# Altium PCB Eurocard VME 3U with break-away tab (3.937 x 8.660 inches).PCBDOC
Units mil, origin at the board's own origin, x right, y up, seen from the top; angles counter-clockwise.
Board outline 8660 x 4687 mil, 10 copper layers (TopLayer, MidLayer1, MidLayer2, MidLayer3, MidLayer4, MidLayer5, MidLayer6, MidLayer7, MidLayer8, BottomLayer); 1 components, 0 nets, 116 pads, 0 vias.
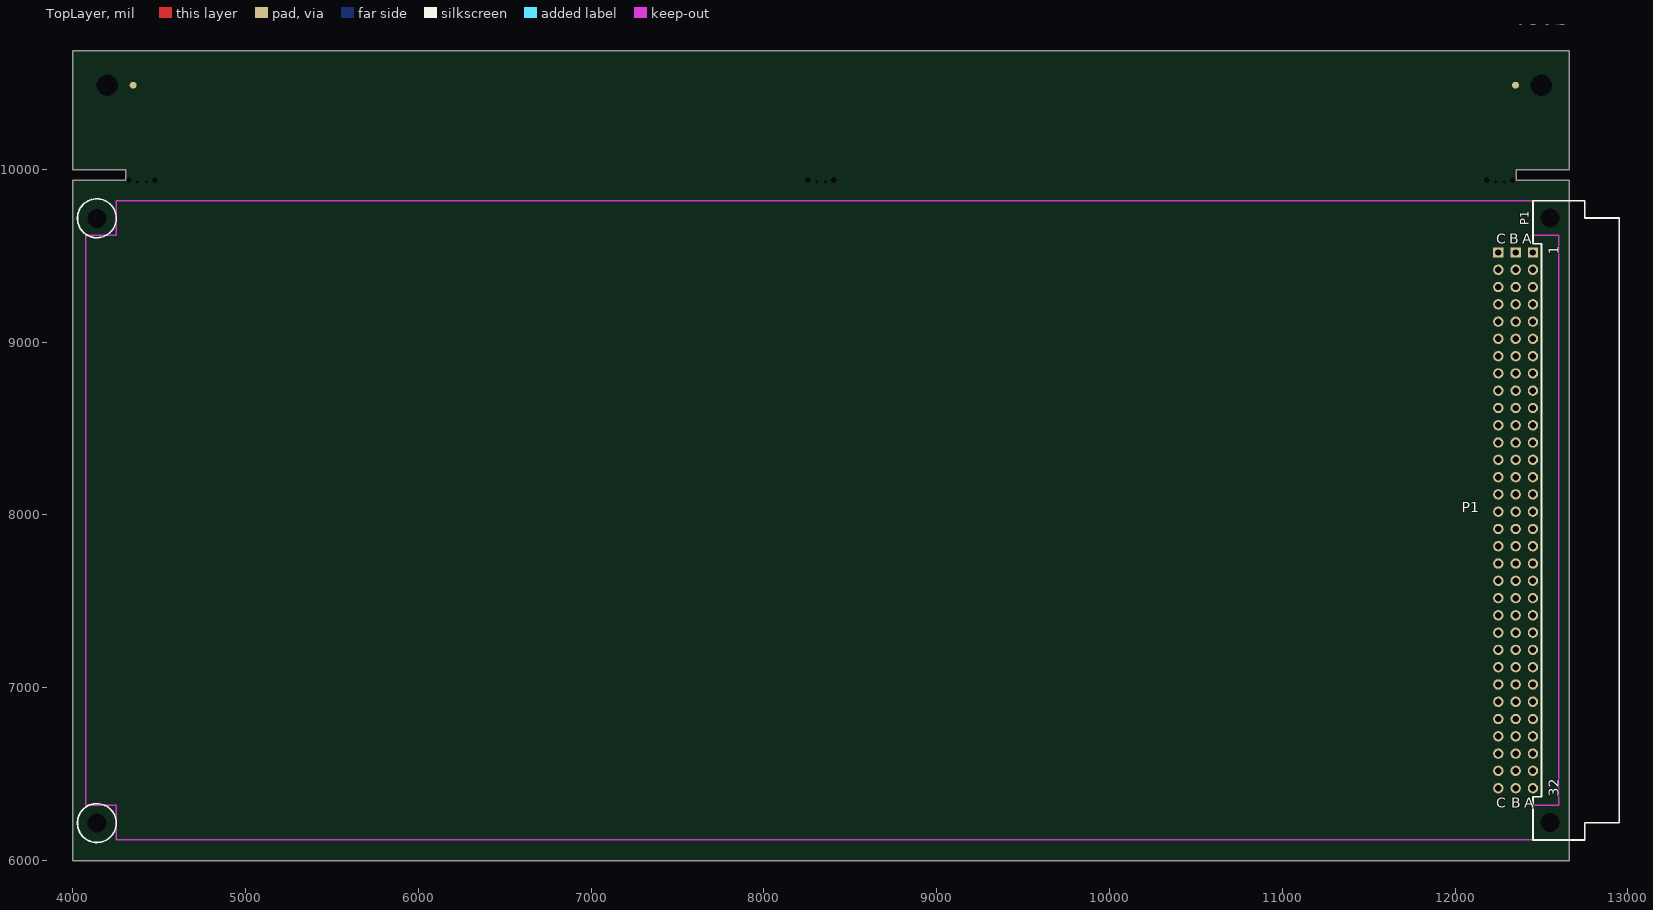
[diagram p0: TopLayer view]
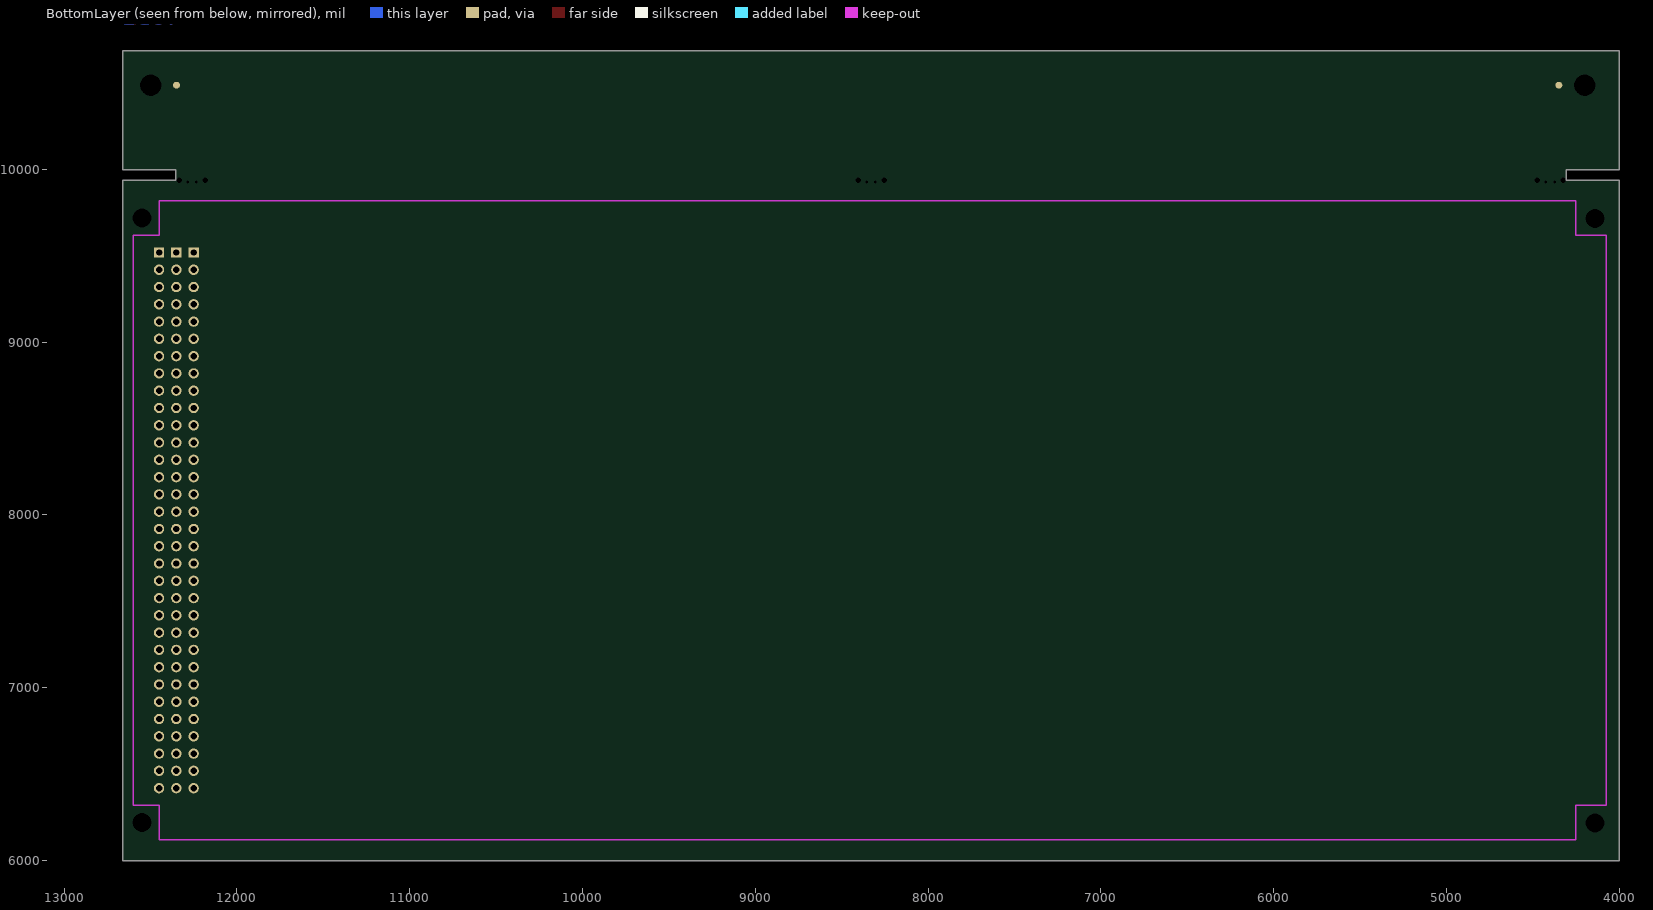
[diagram p1: BottomLayer view, seen from below]
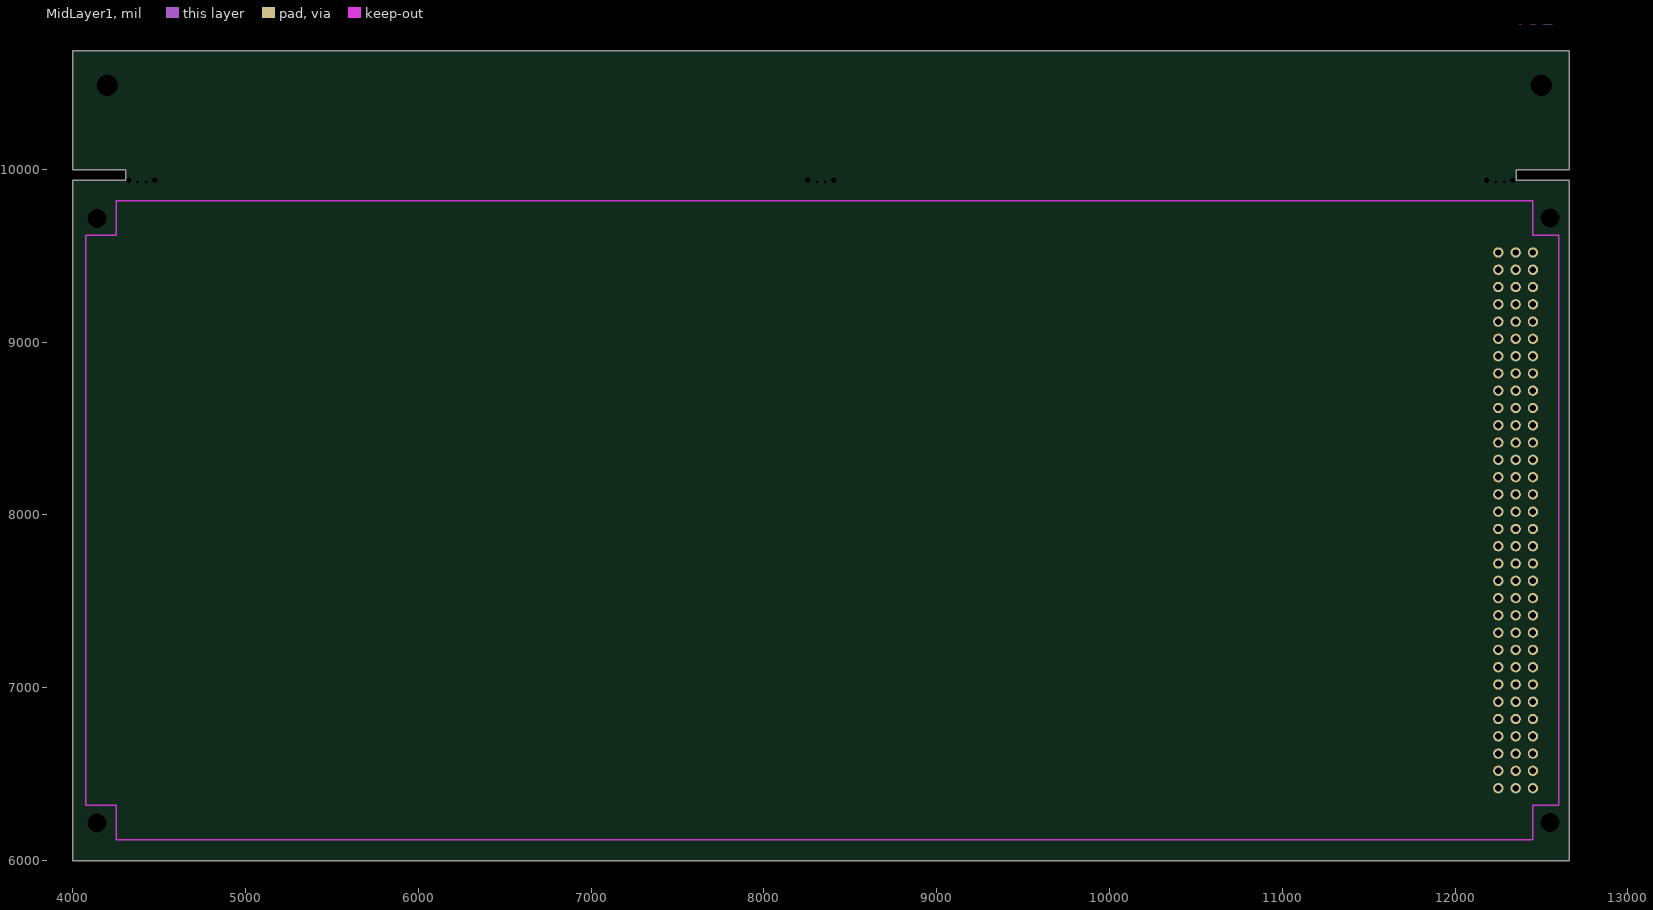
[diagram p2: MidLayer1]
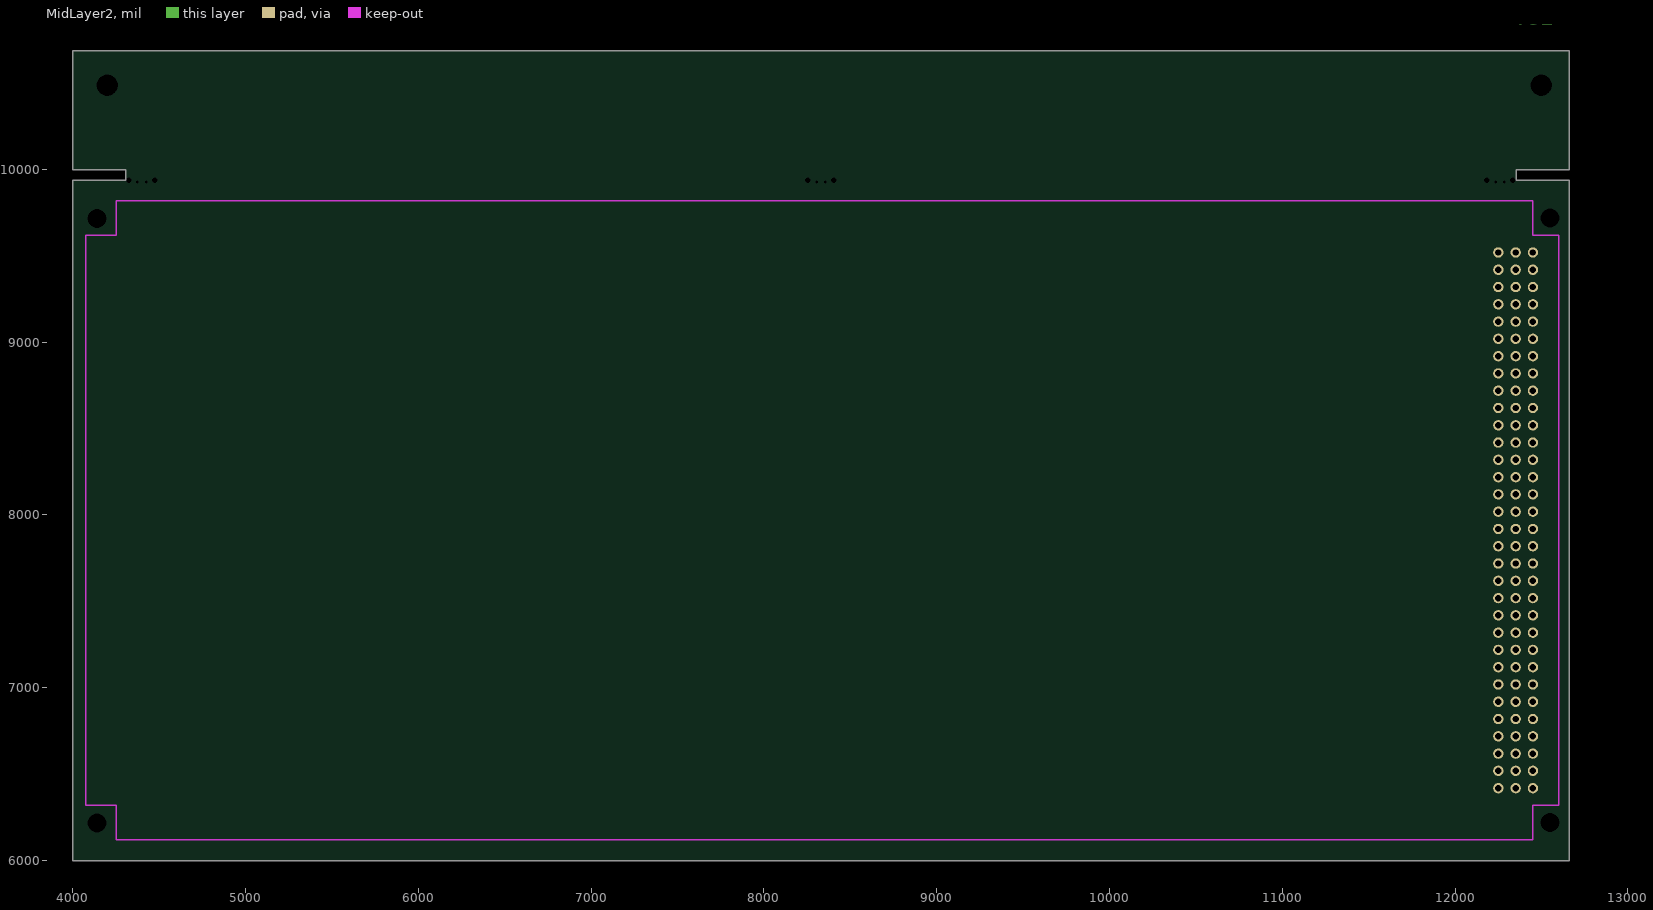
[diagram p3: MidLayer2]
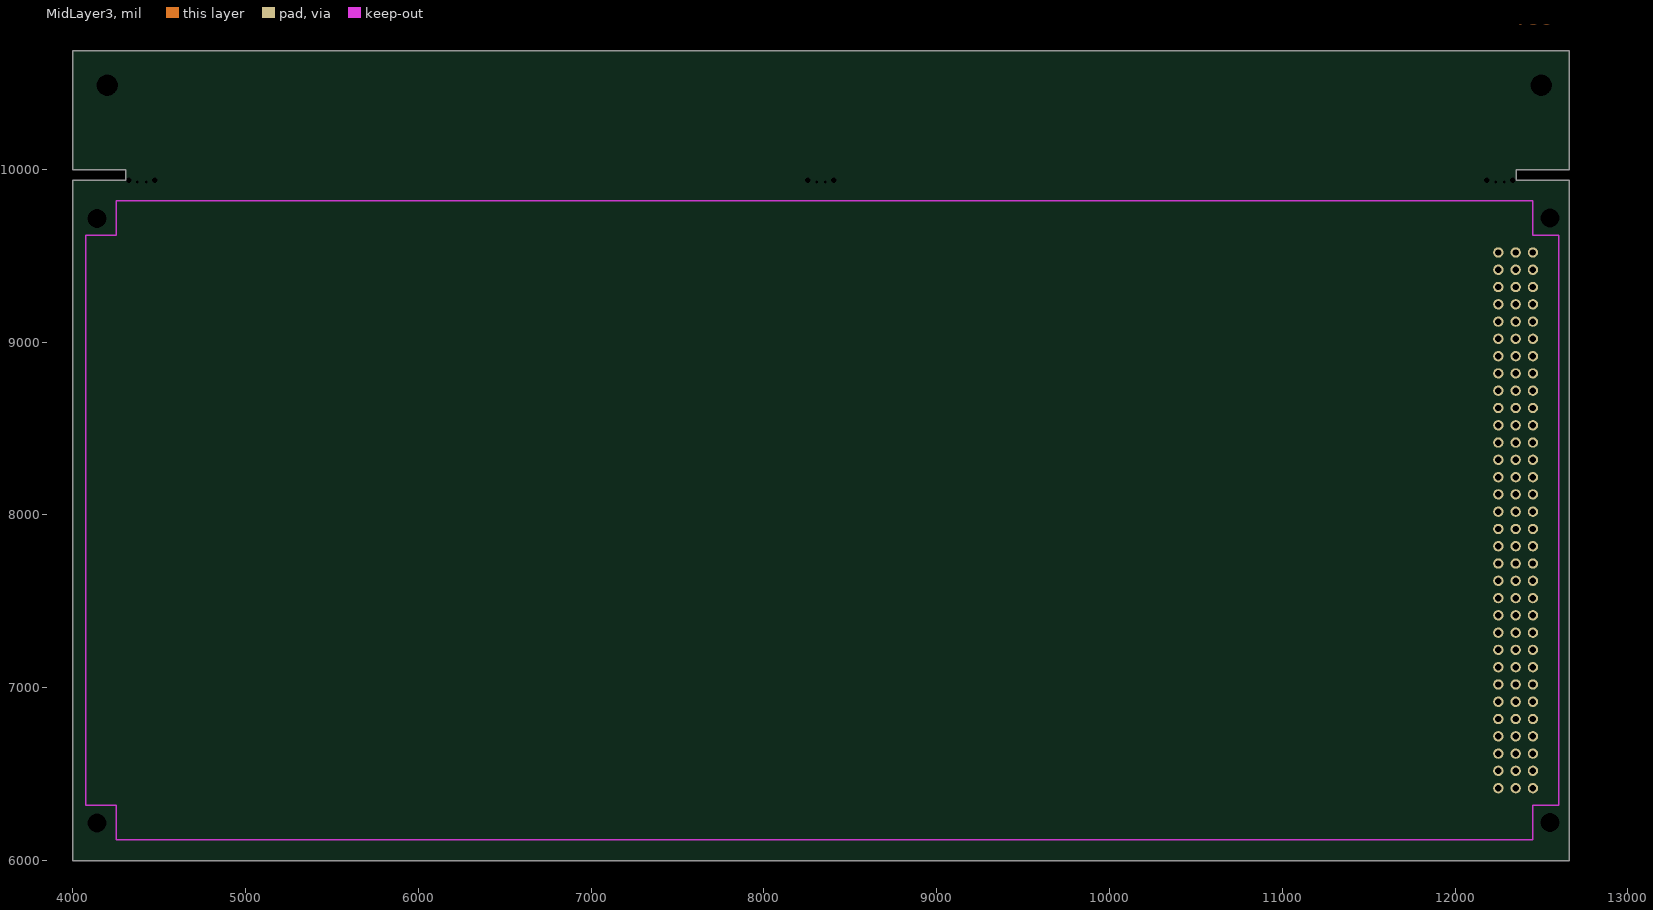
[diagram p4: MidLayer3]
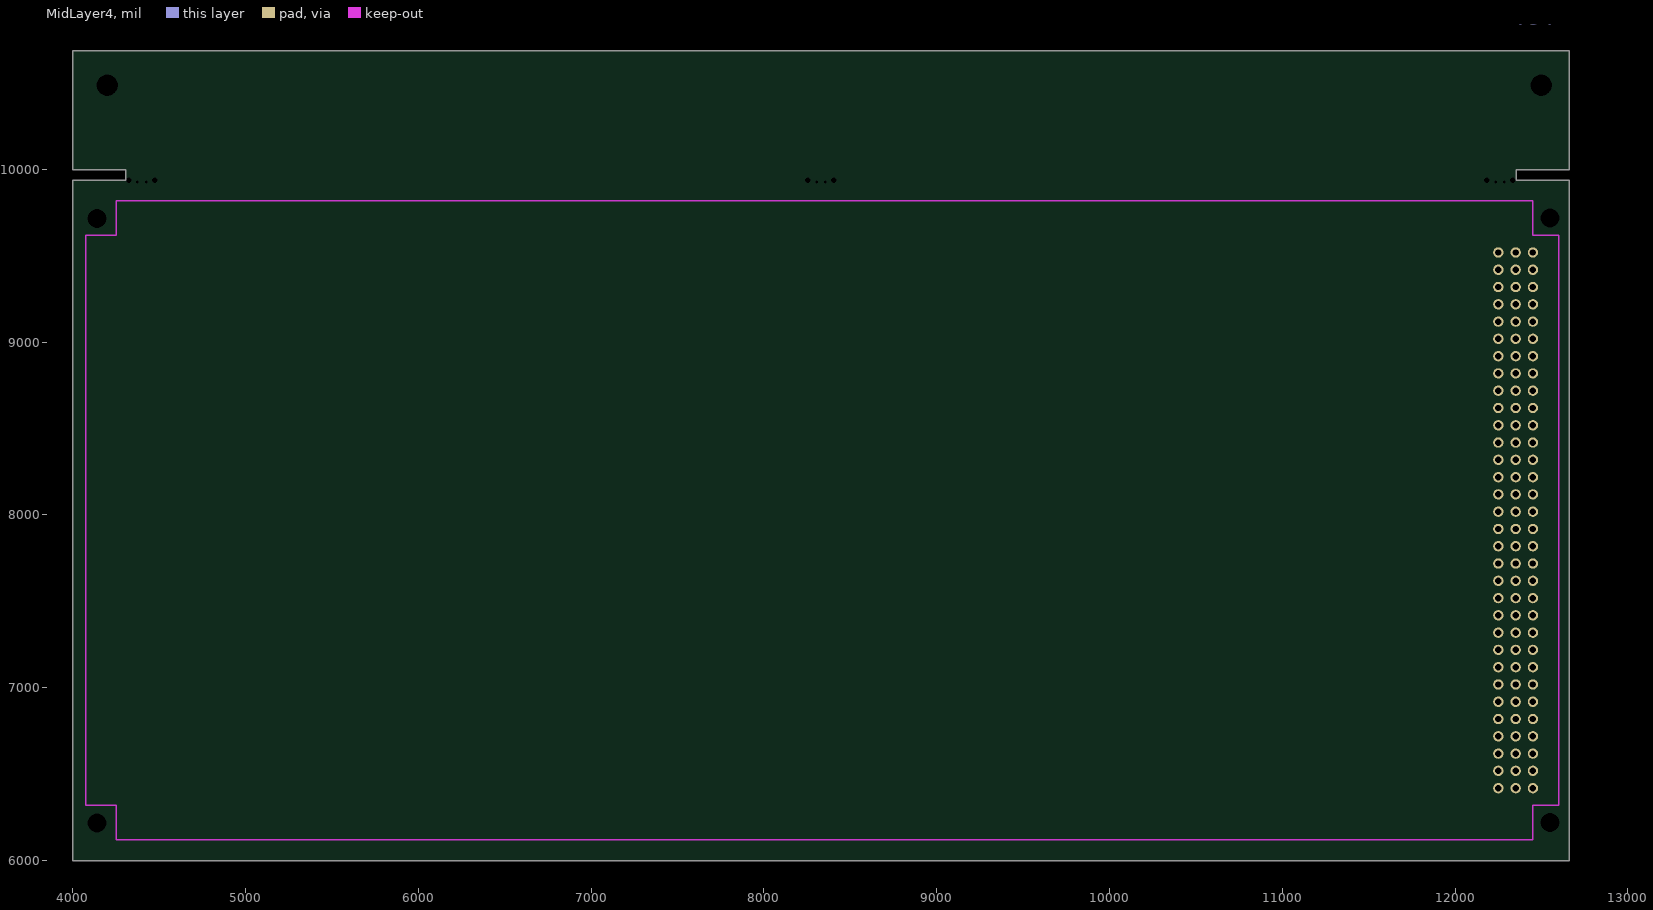
[diagram p5: MidLayer4]
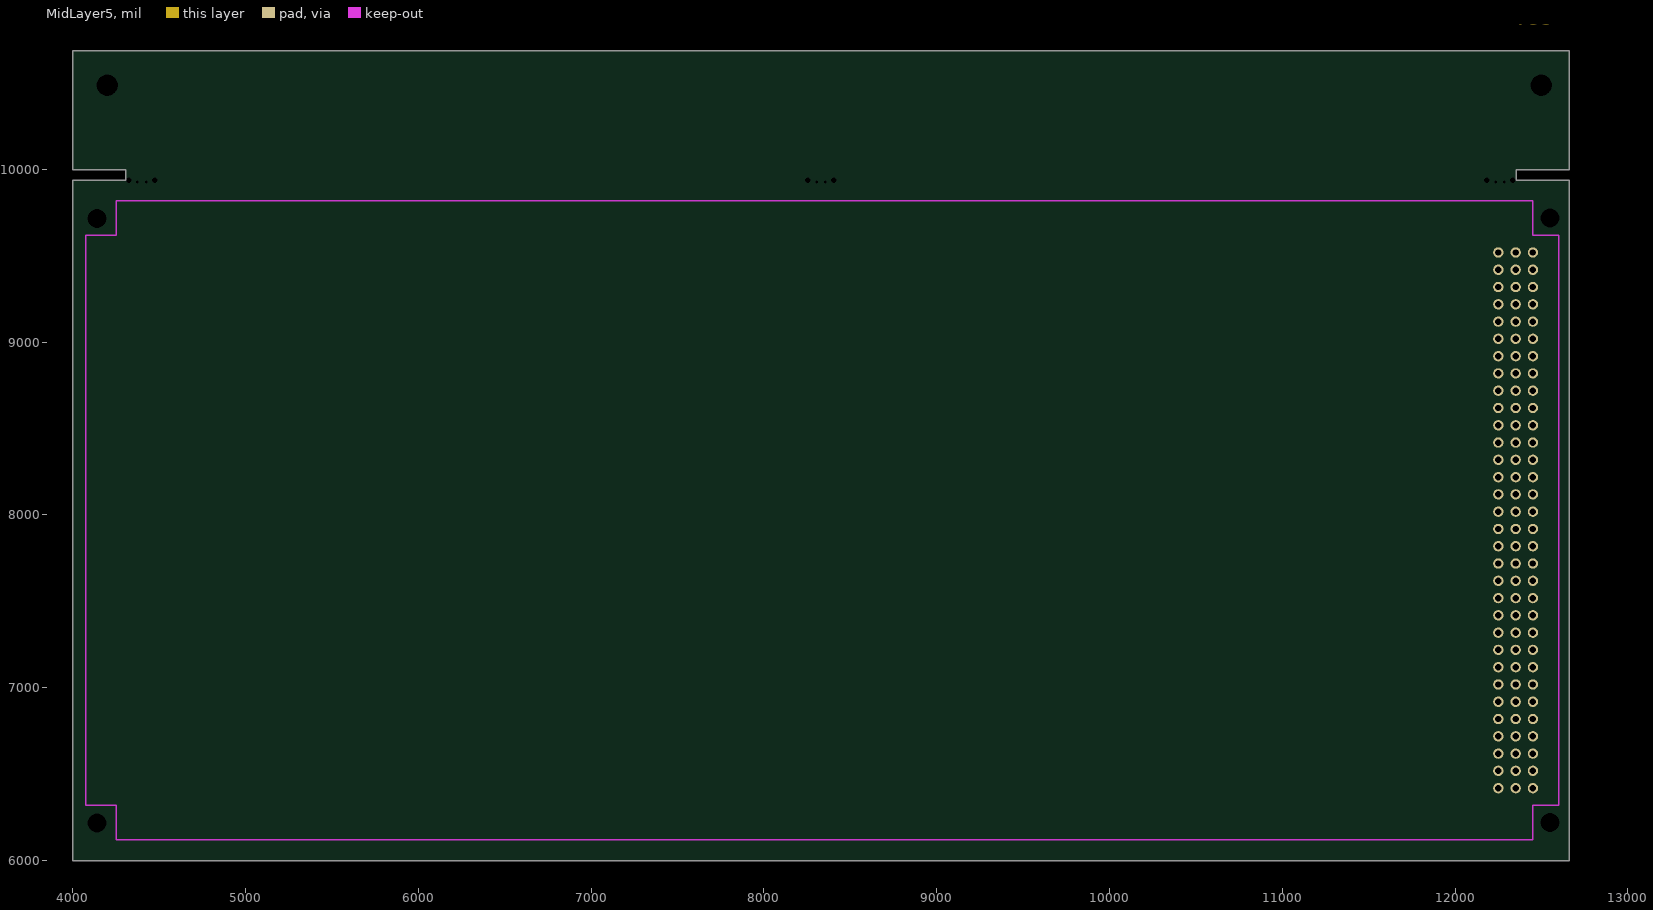
[diagram p6: MidLayer5]
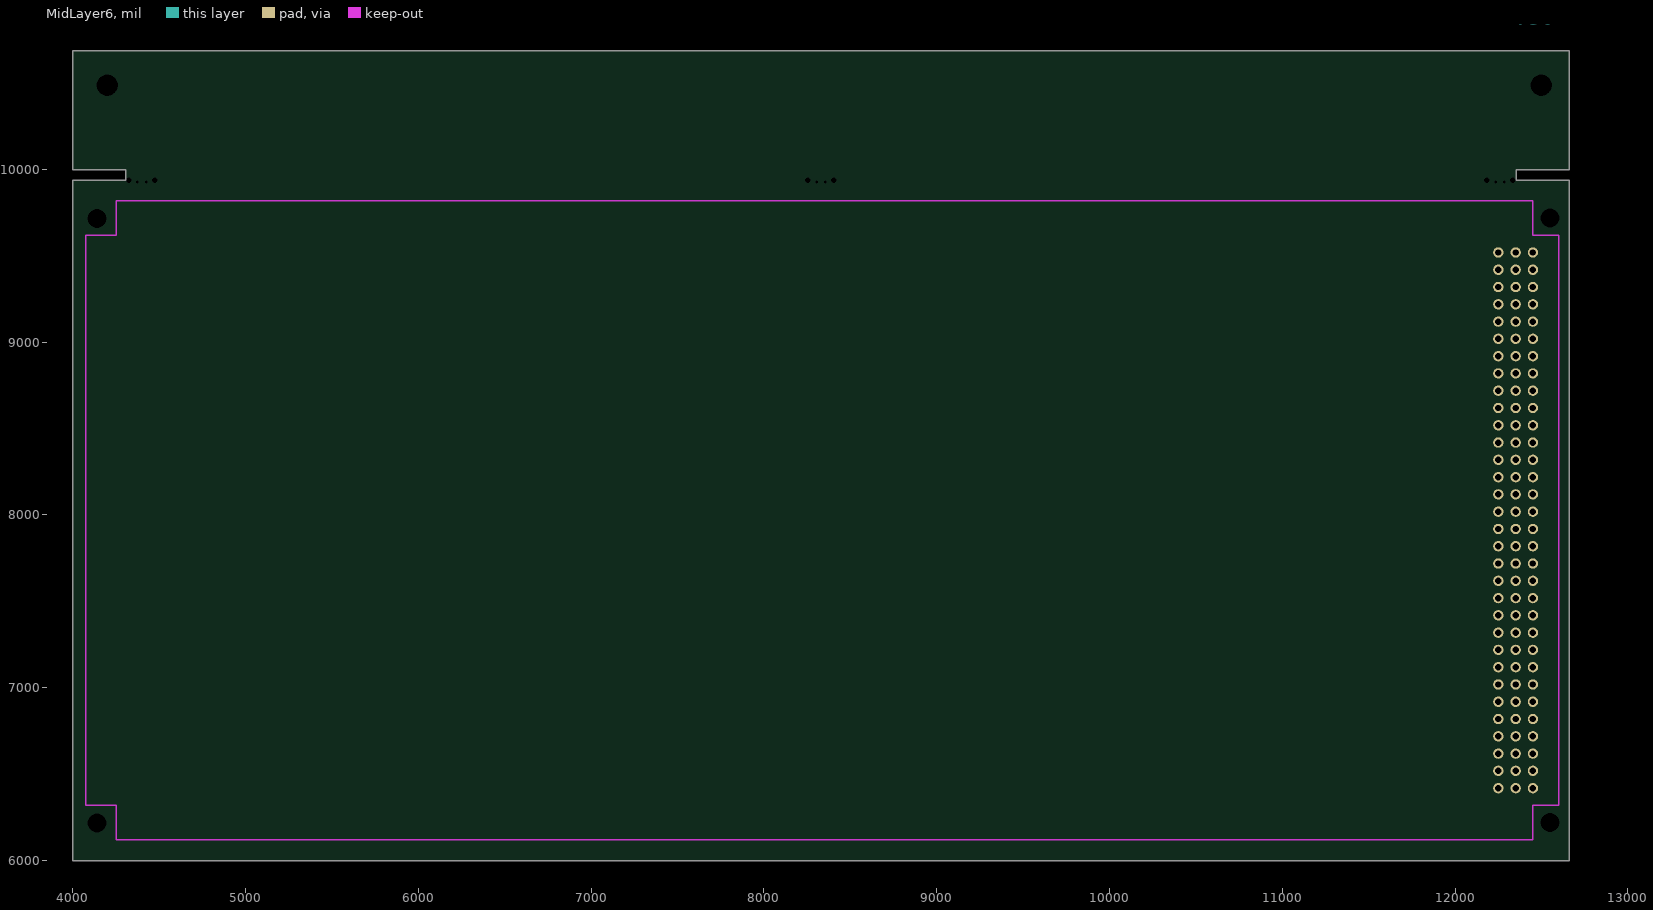
[diagram p7: MidLayer6]
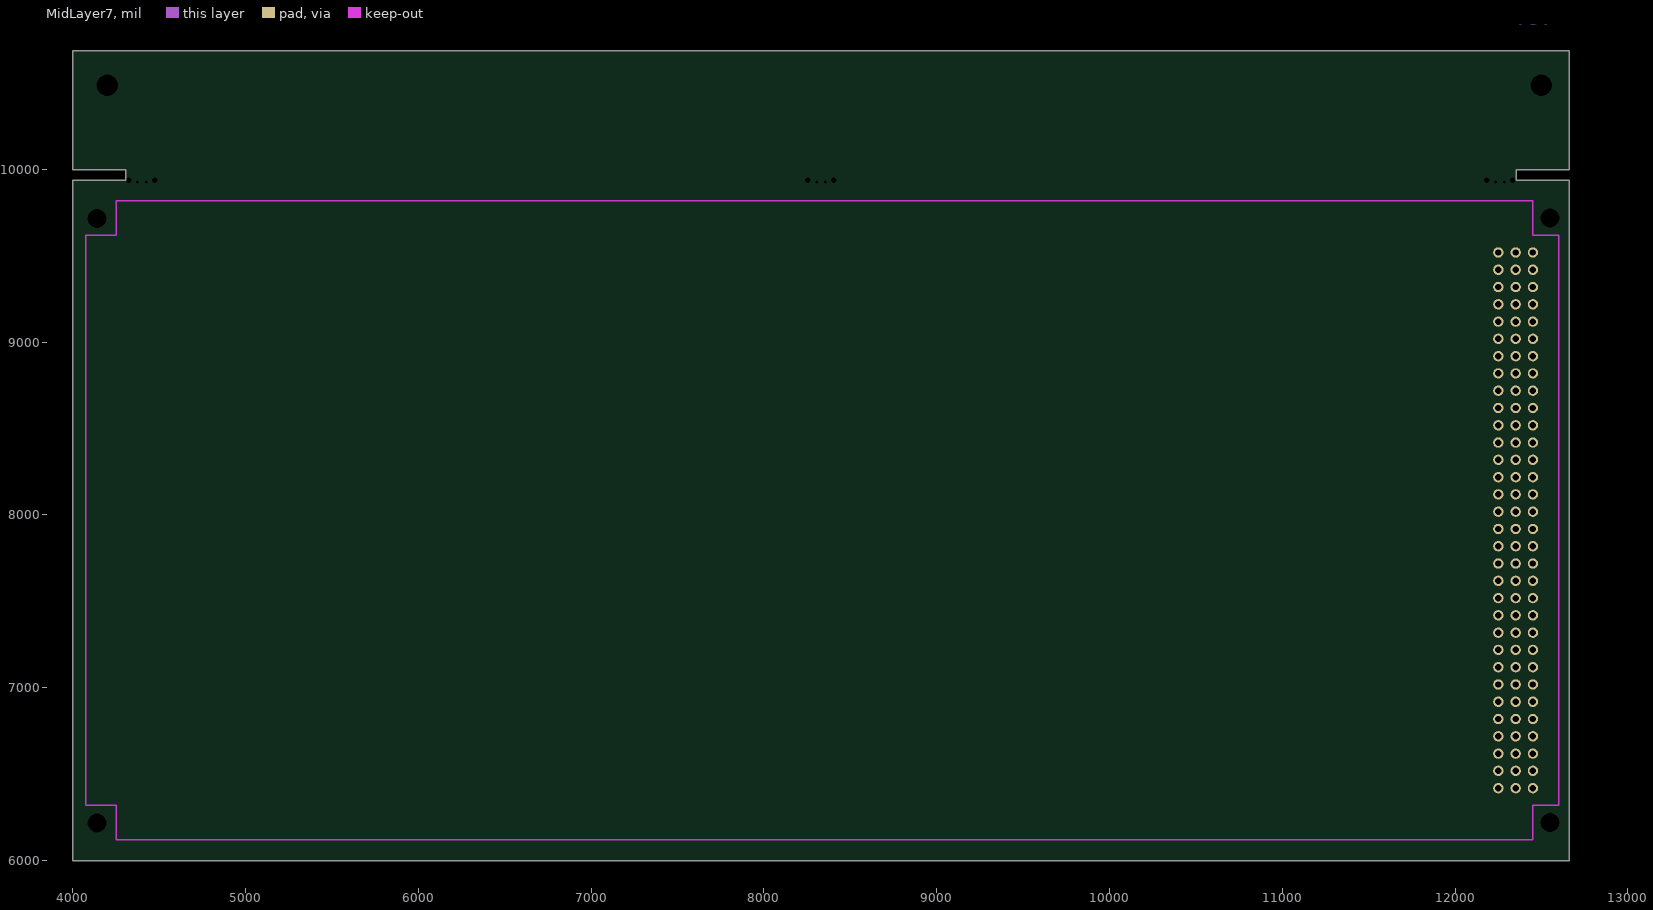
[diagram p8: MidLayer7]
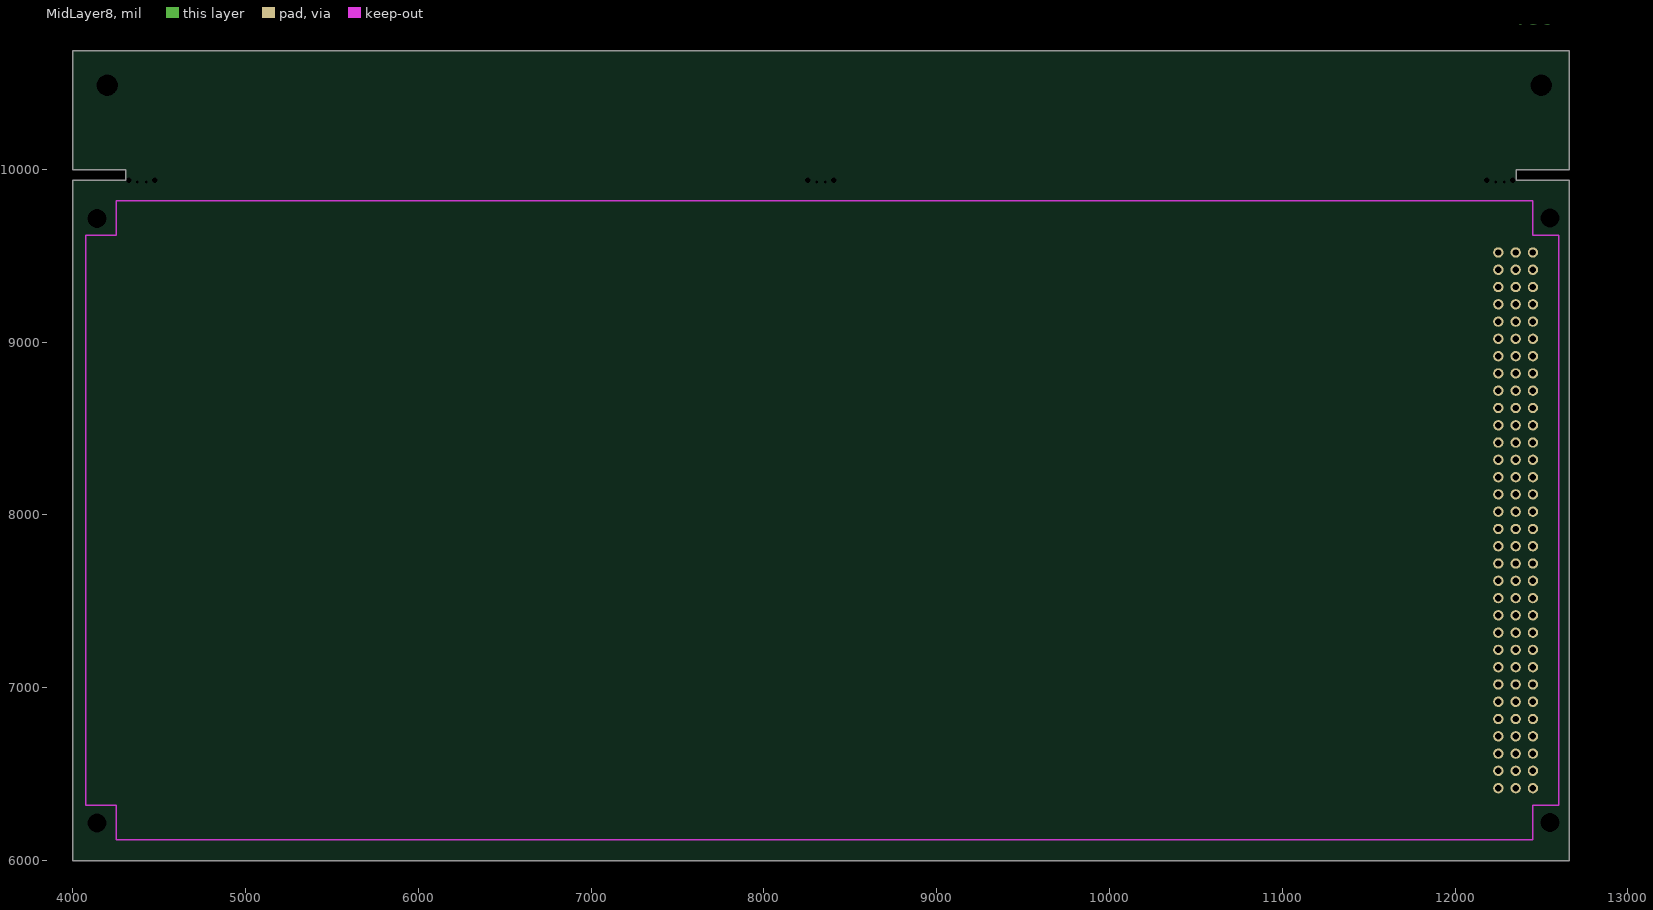
[diagram p9: MidLayer8]

## Layer stack, top to bottom
TopSolder: solder mask 0.4, Solder Resist, Dk 3.5
TopLayer: signal copper 1.4
Dielectric1: core 12.6, FR-4, Dk 4.8
MidLayer1: signal copper 1.4
Dielectric2: prepreg 12.6, FR-4, Dk 4.8
MidLayer2: signal copper 1.4
Dielectric3: core 12.6, FR-4, Dk 4.8
MidLayer3: signal copper 1.4
Dielectric4: prepreg 12.6, FR-4, Dk 4.8
MidLayer4: signal copper 1.4
Dielectric5: core 12.6, FR-4, Dk 4.8
MidLayer5: signal copper 1.4
Dielectric6: prepreg 12.6, FR-4, Dk 4.8
MidLayer6: signal copper 1.4
Dielectric7: core 12.6, FR-4, Dk 4.8
MidLayer7: signal copper 1.4
Dielectric8: prepreg 12.6, FR-4, Dk 4.8
MidLayer8: signal copper 1.4
Dielectric9: core 12.6, FR-4, Dk 4.8
BottomLayer: signal copper 1.4
BottomSolder: solder mask 0.4, Solder Resist, Dk 3.5

## Board outline
4000,6000 12660,6000 12660,9937 12353,9937 12353,9999 12660,9999 12660,10687 4000,10687 4000,9999 4307,9999 4307,9937 4000,9937

## Design rules (kind name [scope] priority, off if disabled: settings)
Clearance [All] p1: gap=10
FabricationTestPointUsage TestPointUsage [All] p1: valid=0 allowmultiple=FALSE
FabricationTestpoint Testpoint [All] p1: side=3 testpointundercomponent=TRUE minsize=40 maxsize=100 preferedsize=60 minholesize=20 maxholesize=40 preferedholesize=32 testpointgrid=1 allowsidetop=TRUE allowsidebottom=TRUE usegrid=TRUE gridtolerance=0.01
PlaneClearance [All] p1: clearance=10
PolygonConnect [All] p1: connectstyle=Relief reliefconductorwidth=10 reliefentries=4 polygonreliefangle="90 Angle" airgapwidth=10
RoutingVias [All] p1: holewidth=28 width=50 viastyle="Through Hole" minholewidth=28 minwidth=50 maxholewidth=28 maxwidth=50
SilkToSolderMaskClearance SilkscreenOverComponentPads [IsPad] p1: minsilkscreentomaskgap=10 clearancetoexposedcopper=TRUE
SolderMaskExpansion SolderMaskExpansion_1 [HasPad('Free-14')] p1: expansion=20
SolderMaskExpansion [HasPad('Free-1')] p2: expansion=20
SolderMaskExpansion SolderMaskExpansion_2 [All] p3: expansion=2
Width [All] p1: maxlimit=10 minlimit=10 preferedwidth=10
26 further rules are at their usual default settings.

## Components (designator, comment, footprint, x,y, rotation, side; value= is the part's Value field where it differs from the comment)
P1 "CNVME96" CNVME96 12451,9519 r90 top locked

## Footprints (in the part's own frame and the unit in brackets; to place one, negate y for a bottom-side part, rotate by r counter-clockwise, add the part's x,y. Pads: shape width x height; smd on the part's side, far side on the other; paste and mask are expansions set on the pad)
CNVME96 [mil]
  round 50 hole 110: 97(200,-100) 98(-3300,-100)
  rect 60x60 / inner round 60 / far side rect 60x60 hole 37: A1(0,0) B1(0,100) C1(0,200)
  round 60 hole 37: A2(-100,0) A3(-200,0) A4(-300,0) A5(-400,0) A6(-500,0) A7(-600,0) A8(-700,0) A9(-800,0) A10(-900,0) A11(-1000,0) A12(-1100,0) A13(-1200,0) A14(-1300,0) A15(-1400,0) A16(-1500,0) A17(-1600,0) A18(-1700,0) A19(-1800,0) A20(-1900,0) A21(-2000,0) A22(-2100,0) A23(-2200,0) A24(-2300,0) A25(-2400,0) A26(-2500,0) A27(-2600,0) A28(-2700,0) A29(-2800,0) A30(-2900,0) A31(-3000,0) A32(-3100,0) B2(-100,100) B3(-200,100) B4(-300,100) B5(-400,100) B6(-500,100) B7(-600,100) B8(-700,100) B9(-800,100) B10(-900,100) B11(-1000,100) B12(-1100,100) B13(-1200,100) B14(-1300,100) B15(-1400,100) B16(-1500,100) B17(-1600,100) B18(-1700,100) B19(-1800,100) B20(-1900,100) B21(-2000,100) B22(-2100,100) B23(-2200,100) B24(-2300,100) B25(-2400,100) B26(-2500,100) B27(-2600,100) B28(-2700,100) B29(-2800,100) B30(-2900,100) B31(-3000,100) B32(-3100,100) C2(-100,200) C3(-200,200) C4(-300,200) C5(-400,200) C6(-500,200) C7(-600,200) C8(-700,200) C9(-800,200) C10(-900,200) C11(-1000,200) C12(-1100,200) C13(-1200,200) C14(-1300,200) C15(-1400,200) C16(-1500,200) C17(-1600,200) C18(-1700,200) C19(-1800,200) C20(-1900,200) C21(-2000,200) C22(-2100,200) C23(-2200,200) C24(-2300,200) C25(-2400,200) C26(-2500,200) C27(-2600,200) C28(-2700,200) C29(-2800,200) C30(-2900,200) C31(-3000,200) C32(-3100,200)
  silkscreen extent -3400,-500 300,0

## Free pads (board coordinates)
  round 40 / inner round 0 / far side round 40 all layers, no hole: 1(4350,10487) 14(12350,10487)
  round 0 hole 32: 2(12185,9937) 5(12335,9937) 6(8255,9937) 9(8405,9937) 10(4325,9937) 13(4475,9937)
  round 0 hole 20: 3(12235,9927) 4(12285,9927) 7(8305,9927) 8(8355,9927) 11(4375,9927) 12(4425,9927)
  round 50 hole 125: 15(12500,10487) 16(4200,10487)
  round 50 hole 110: 17(4140,9717) 18(4140,6217)

## Nets (pads, with @x,y where several pads share a name; then routed paths per layer and width w, separated by ;. In a path a pad name is that pad's centre, name@x,y a point inside that pad or via, vN(x,y) a via of type N, cw(c..) or ccw(c..) an arc to the next point about the centre after c; other vN are vias at no path point)
pads on no net: P1.97 P1.98 P1.A1 P1.A2 P1.A3 P1.A4 P1.A5 P1.A6 P1.A7 P1.A8 P1.A9 P1.A10 P1.A11 P1.A12 P1.A13 P1.A14 P1.A15 P1.A16 P1.A17 P1.A18 P1.A19 P1.A20 P1.A21 P1.A22 P1.A23 P1.A24 P1.A25 P1.A26 P1.A27 P1.A28 P1.A29 P1.A30 P1.A31 P1.A32 P1.B1 P1.B2 P1.B3 P1.B4 P1.B5 P1.B6 P1.B7 P1.B8 P1.B9 P1.B10 P1.B11 P1.B12 P1.B13 P1.B14 P1.B15 P1.B16 P1.B17 P1.B18 P1.B19 P1.B20 P1.B21 P1.B22 P1.B23 P1.B24 P1.B25 P1.B26 P1.B27 P1.B28 P1.B29 P1.B30 P1.B31 P1.B32 P1.C1 P1.C2 P1.C3 P1.C4 P1.C5 P1.C6 P1.C7 P1.C8 P1.C9 P1.C10 P1.C11 P1.C12 P1.C13 P1.C14 P1.C15 P1.C16 P1.C17 P1.C18 P1.C19 P1.C20 P1.C21 P1.C22 P1.C23 P1.C24 P1.C25 P1.C26 P1.C27 P1.C28 P1.C29 P1.C30 P1.C31 P1.C32

## Keep-outs
KeepOutLayer:
  lines w8: 4076,6319 4251,6319 4251,6119 12451,6119 12451,6319 12601,6319 12601,9619 12451,9619 12451,9819 4251,9819 4251,9619 4076,9619 4076,6319

## Other copper
TopLayer:
  text ".GTL" at 12360,10837 h90
MidLayer1:
  text ".G1" at 12360,10837 h90
MidLayer2:
  text ".G2" at 12360,10837 h90
MidLayer3:
  text ".G3" at 12360,10837 h90
MidLayer4:
  text ".G4" at 12360,10837 h90
MidLayer5:
  text ".G5" at 12360,10837 h90
MidLayer6:
  text ".G6" at 12360,10837 h90
MidLayer7:
  text ".G7" at 12360,10837 h90
MidLayer8:
  text ".G8" at 12360,10837 h90
BottomLayer:
  text "P/N XXXXXX-XXX REV A" at 5320,10887 h75
  text ".GBL" at 12360,10837 h90

## Silkscreen, mask and mechanical layers (free items; w line width, h text height)
TopOverlay:
  circle w10: c4140,6217 r112.5
  circle w10: c4140,9717 r112.5
  rectangle: 4281,11090 5031,11290
  rectangle: 4281,11380 5031,11580
  lines w10: 5392.59,11482.97 ccw(c5441,11522.5) 5392.71,11482.83
  text "C" at 5496,11485 h60
  text "2002 COMPANY NAME" at 5646,11485 h75
  text "S/N" at 4031,11437.5 h75
  text "BOARD NAME" at 5496,11310 h75
  text "ASSY NO.: XXXXXX" at 5496,11160 h75
  text "REV" at 4031,11140 h75
  text ".GTO" at 12360,10837 h90
  text "P1" at 12040,8017 h60
TopPaste:
  text ".GTP" at 12360,10837 h90
BottomPaste:
  text ".GBP" at 12360,10837 h90
TopSolder:
  text ".GTS" at 12360,10837 h90
BottomSolder:
  text ".GBS" at 12360,10837 h90
Mechanical1:
  lines w20: 4000,6000 12660,6000 12660,9937 12353,9937 12353,9999 12660,9999 12660,10687 4000,10687 4000,9999 4307,9999 4307,9937 4000,9937 4000,6000 ; 4493,9937 8237,9937 8237,9999 4493,9999 4493,9937 ; 8423,9937 12167,9937 12167,9999 8423,9999 8423,9937
Mechanical4:
  text ".Pcb_File_Name_No_Path" at 10460,11027 h90
  text ".Printout_Name" at 10460,10837 h90
DrillDrawing:
  text ".LEGEND" at 13426,6244 h90
  text "Drilling Details." at 13426,6094 h90

## Dimensions
3980,6217 to 4000,6000 on Mechanical4
4140,5980 to 4000,6000 on Mechanical4

## Text inside footprints (layer, text, board x,y; h text height)
P1: TopOverlay "C" at 12238.5,9569 h60; TopOverlay "B" at 12313.5,9569 h60; TopOverlay "A" at 12388.5,9569 h60; TopOverlay "C" at 12238.5,6306.5 h60; TopOverlay "B" at 12326,6306.5 h60; TopOverlay "A" at 12401,6306.5 h60; TopOverlay "32" at 12601,6369 h60 r90; TopOverlay "1" at 12601,9506.5 h60 r90